# EAGLE board MBO (EAGLE 7.4.0)
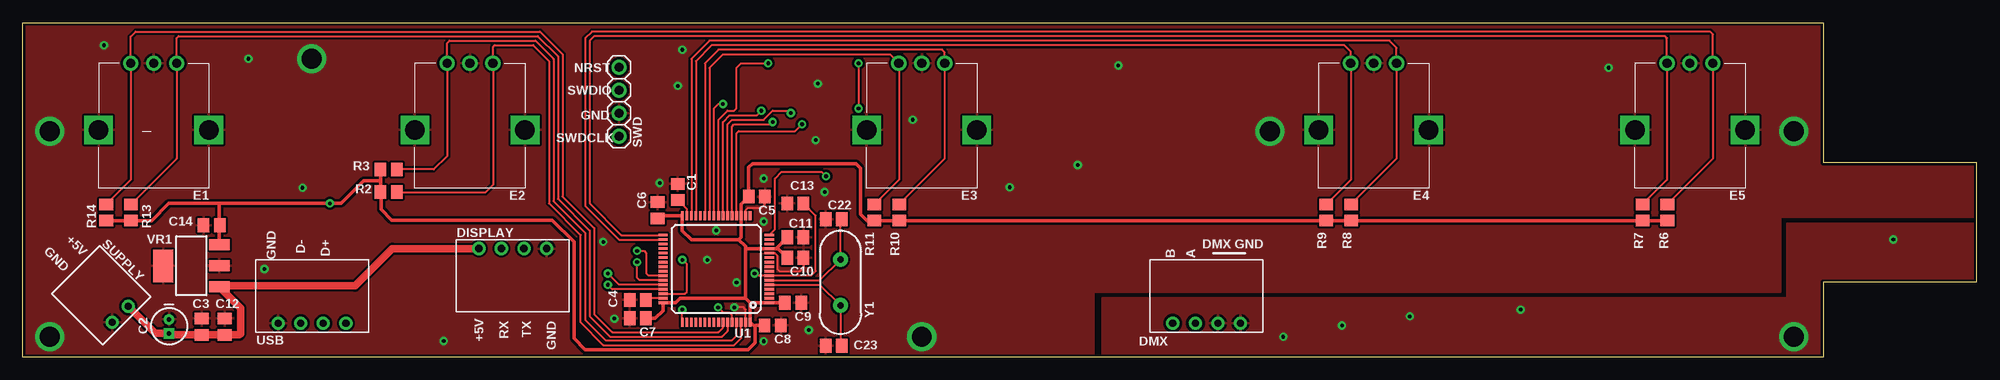
[diagram p0: board, top side]
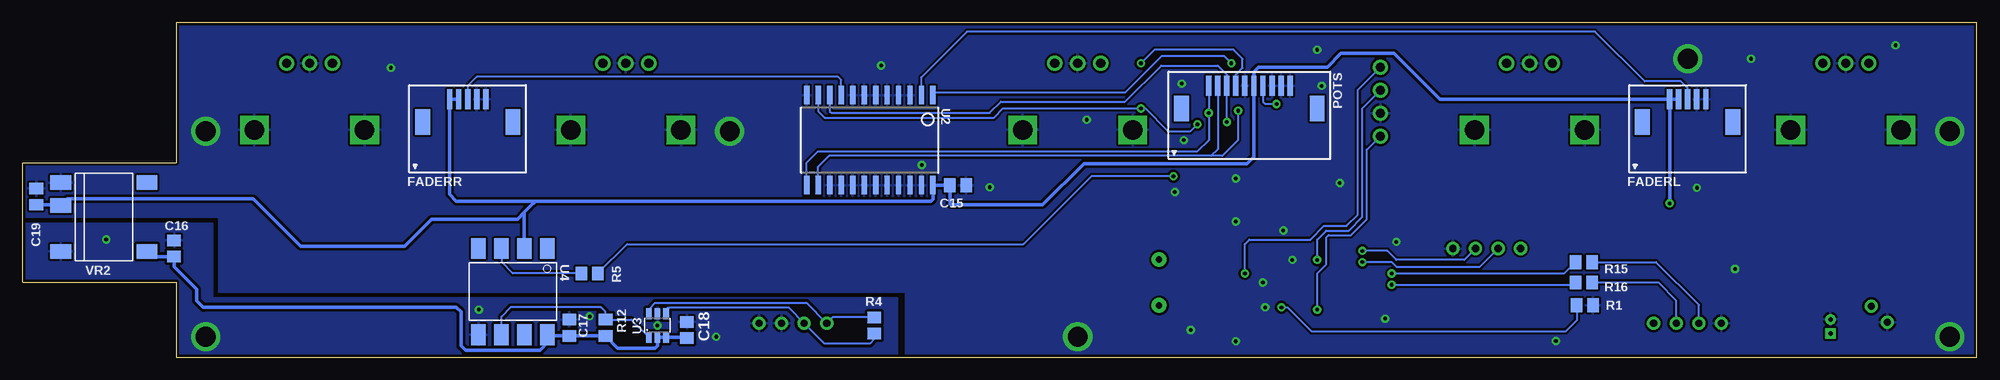
[diagram p1: board, bottom side, seen from below]

Size 216.25 x 37 mm. Coordinates in mm from the lower left corner, seen from the top.
Outline: 216.25,8.25 199.25,8.25 199.25,0 0,0 0,37 199.25,37 199.25,21.5 216.25,21.5 216.25,8.25
Copper layers (1*16): Top 0.035mm / dielectric 1.5mm / Bottom 0.035mm
Design rules "smiery *": minimum track width 8mil, minimum drill 12mil, track to track 7mil, track to pad 5mil, pad to pad 5mil, via to via 6mil, smd to smd 0mil, copper to edge 12mil, drill to drill 10mil, minimum pad ring 13mil, minimum via ring 10mil, stop-mask expansion 2mil, vias tented up to drill 25mil, thermal gap 10mil
Net classes: 0 default: width 0.203 mm; 1 vcc: width 0.254 mm

## Footprints (pad centres in the part's own frame; a part is rotated, then mirrored left to right if it is on the bottom)
C0805 = smd 1.27 x 1.524: 1 -0.9,0; 2 0.9,0
C-TH-E-0401 = drill 0.5 square: + 0.77,0 | drill 0.5: - -0.77,0
JST-XH-04P-H = drill 0.8: 1 -3.73,0; 2 -1.23,0; 3 1.27,0; 4 3.77,0
EC12E-1 = drill 1.016: A -2.54,-7.493; B 2.54,-7.493; C 0,-7.493 | drill 2.159 square: S1 -6.096,-0.127; S2 6.096,-0.127
MOLEX-52271-0579 = smd 0.6 x 2.2: 1 -2,3.5; 2 -1,3.5; 3 0,3.5; 4 1,3.5; 5 2,3.5 | smd 1.65 x 2.8: S1 -5,1; S2 5,1
MOLEX-52271-1079 = smd 0.6 x 2.2: 1 -4.5,3.5; 2 -3.5,3.5; 3 -2.5,3.5; 4 -1.5,3.5; 5 -0.5,3.5; 6 0.5,3.5; 7 1.5,3.5; 8 2.5,3.5; 9 3.5,3.5; 10 4.5,3.5 | smd 1.65 x 2.8: S1 -7.5,1; S2 7.5,1
R0805 = smd 1.27 x 1.524: 1 -0.9,0; 2 0.9,0
JST-XH-02P-H = drill 0.8: 1 -1.25,0; 2 1.25,0
1X04-2.54 = drill 1.016: 1 -3.81,0; 2 -1.27,0; 3 1.27,0; 4 3.81,0
TQFP-64-10X10-HS = smd 1 x 0.3: 1 -5.875,3.75; 2 -5.875,3.25; 3 -5.875,2.75; 4 -5.875,2.25; 5 -5.875,1.75; 6 -5.875,1.25; 7 -5.875,0.75; 8 -5.875,0.25; 9 -5.875,-0.25; 10 -5.875,-0.75; 11 -5.875,-1.25; 12 -5.875,-1.75; 13 -5.875,-2.25; 14 -5.875,-2.75; 15 -5.875,-3.25; 16 -5.875,-3.75; 33 5.875,-3.75; 34 5.875,-3.25; 35 5.875,-2.75; 36 5.875,-2.25; 37 5.875,-1.75; 38 5.875,-1.25; 39 5.875,-0.75; 40 5.875,-0.25; 41 5.875,0.25; 42 5.875,0.75; 43 5.875,1.25; 44 5.875,1.75; 45 5.875,2.25; 46 5.875,2.75; 47 5.875,3.25; 48 5.875,3.75 | smd 0.3 x 1: 17 -3.75,-5.875; 18 -3.25,-5.875; 19 -2.75,-5.875; 20 -2.25,-5.875; 21 -1.75,-5.875; 22 -1.25,-5.875; 23 -0.75,-5.875; 24 -0.25,-5.875; 25 0.25,-5.875; 26 0.75,-5.875; 27 1.25,-5.875; 28 1.75,-5.875; 29 2.25,-5.875; 30 2.75,-5.875; 31 3.25,-5.875; 32 3.75,-5.875; 49 3.75,5.875; 50 3.25,5.875; 51 2.75,5.875; 52 2.25,5.875; 53 1.75,5.875; 54 1.25,5.875; 55 0.75,5.875; 56 0.25,5.875; 57 -0.25,5.875; 58 -0.75,5.875; 59 -1.25,5.875; 60 -1.75,5.875; 61 -2.25,5.875; 62 -2.75,5.875; 63 -3.25,5.875; 64 -3.75,5.875
SO24-W = smd 2.032 x 0.6: 1 -4.975,6.985; 2 -4.975,5.715; 3 -4.975,4.445; 4 -4.975,3.175; 5 -4.975,1.905; 6 -4.975,0.635; 7 -4.975,-0.635; 8 -4.975,-1.905; 9 -4.975,-3.175; 10 -4.975,-4.445; 11 -4.975,-5.715; 12 -4.975,-6.985; 13 4.975,-6.985; 14 4.975,-5.715; 15 4.975,-4.445; 16 4.975,-3.175; 17 4.975,-1.905; 18 4.975,-0.635; 19 4.975,0.635; 20 4.975,1.905; 21 4.975,3.175; 22 4.975,4.445; 23 4.975,5.715; 24 4.975,6.985
TSOT23-6 = smd 0.62 x 1.22: 1 -0.95,-1.3; 2 0,-1.3; 3 0.95,-1.3; 4 0.95,1.3; 5 0,1.3; 6 -0.95,1.3
SMD-8 = smd 2.3 x 1.6: 1 -4.77,3.81; 2 -4.77,1.27; 3 -4.77,-1.27; 4 -4.77,-3.81; 5 4.77,-3.81; 6 4.77,-1.27; 7 4.77,1.27; 8 4.77,3.81
SOT223 = smd 2.235 x 1.219: 1 -3.099,2.311; 2 -3.099,0; 3 -3.099,-2.311 | smd 2.2 x 3.6: 4 3.099,0
SMD-8-5 = smd 1.6 x 2.3: 1 -3.81,-4.77; 2 -1.27,-4.77; 4 3.81,-4.77; 5 3.81,4.77; 8 -3.81,4.77
HC49US = drill 0.7 pad 1.651: 1 -2.54,0; 2 2.54,0

## Placement (x,y rotation side)
C1  2.2u  [C0805]  72.5,18.25 270 top
C2  10u  [C-TH-E-0401]  16.22,3.4 270 top
C3  100n  [C0805]  19.81,3.37 90 top
C4  2.2u  [C0805]  68.07,6.31 180 top
C5  100n  [C0805]  81.25,17.75 0 top
C6  100n  [C0805]  70.25,16.25 90 top
C7  100n  [C0805]  68.07,4.28 180 top
C8  100n  [C0805]  83,3.5 0 top
C9  100n  [C0805]  85.25,6 0 top
C10  1u  [C0805]  85.5,11 0 top
C11  100n  [C0805]  85.5,13.25 0 top
C12  4.7u  [C0805]  22.35,3.37 90 top
C13  100n  [C0805]  85.5,17 180 top
C14  4.7u  [C0805]  20.92,14.59 180 top
C15  100n  [C0805]  112.75,19 0 bottom
C16  10u  [C0805]  199.5,12 90 bottom
C17  100n  [C0805]  155.75,3.25 270 bottom
C18  100n  [C0805]  142.75,3 270 bottom
C19  4.7u  [C0805]  214.75,17.75 90 bottom
C22  20p  [C0805]  89.75,15.25 180 top
C23  20p  [C0805]  89.75,1.25 0 top
DISPLAY  PINHD-1X04-JST-XH-H  [JST-XH-04P-H]  54.25,12 180 top
DMX  PINHD-1X04-JST-XH-H  [JST-XH-04P-H]  131,3.75 0 top
E1  ALPS-EC12E24404AX  [EC12E-1]  14.5,25 180 top
E2  ALPS-EC12E24404AX  [EC12E-1]  49.5,25 180 top
E3  ALPS-EC12E24404AX  [EC12E-1]  99.5,25 180 top
E4  ALPS-EC12E24404AX  [EC12E-1]  149.5,25 180 top
E5  ALPS-EC12E24404AX  [EC12E-1]  184.5,25 180 top
FADERL  PINHD-1X05-FFC-1MM-Z  [MOLEX-52271-0579]  32,25 0 bottom
FADERR  PINHD-1X05-FFC-1MM-Z  [MOLEX-52271-0579]  167,25 0 bottom
POTS  PINHD-1X10-FFC-1MM-Z  [MOLEX-52271-1079]  80.5,26.5 0 bottom
R1  510  [R0805]  43.38,5.72 0 bottom
R2  10k  [R0805]  40.5,18.25 180 top
R3  10k  [R0805]  40.5,20.75 180 top
R4  133  [R0805]  122,3.5 270 bottom
R5  750  [R0805]  153.5,9.25 0 bottom
R6  10k  [R0805]  182,16 270 top
R7  10k  [R0805]  179.25,16 270 top
R8  10k  [R0805]  147,16 270 top
R9  10k  [R0805]  144.25,16 270 top
R10  10k  [R0805]  97,16 270 top
R11  10k  [R0805]  94.25,16 270 top
R12  4.7k  [R0805]  151.75,3.25 270 bottom
R13  10k  [R0805]  12,16 270 top
R14  10k  [R0805]  9.25,16 270 top
R15  22  [R0805]  43.5,10.5 0 bottom
R16  22  [R0805]  43.5,8.25 0 bottom
SUPPLY  PINHD-1X02-JST-XH-H  [JST-XH-02P-H]  10.81,4.73 45 top
SWD  PINHD-1X04-TH-2.54MM  [1X04-2.54]  66,28.25 90 top
U1  STM32F405RGT6-10X10-HS  [TQFP-64-10X10-HS]  76.75,9.75 180 top
U2  MC14067BDWR2G-SO24W  [SO24-W]  122.5,24 270 bottom
U3  XR33193ESBTR  [TSOT23-6]  146,3.5 0 bottom
U4  6N137-SMD  [SMD-8]  162,7.25 270 bottom
USB  PINHD-1X04-JST-XH-H  [JST-XH-04P-H]  32,3.75 0 top
VR1  MCP1825  [SOT223]  18.68,10.09 180 top
VR2  ISE0303A  [SMD-8-5]  207.25,15.5 270 bottom
Y1  8MHz  [HC49US]  90.5,8.25 270 top

## Library data of the parts
C1-C19 C22 C23 DISPLAY DMX R1-R16 SUPPLY SWD USB VR2 = igor_lbr
E1-E5 = igor_lbr; MANUFACTURER: ALPS; MPN: EC12E24404A8
FADERL FADERR = igor_lbr; MANUFACTURER: Molex; MPN: 52271-0579
POTS = igor_lbr; MANUFACTURER: Molex; MPN: 52271-1079
U1 = igor_lbr; MANUFACTURER: ST Microelectronics; MPN: STM32F405RGT6
U2 = igor_lbr; MANUFACTURER: ON Semiconductor; MPN: MC14067BDWR2G
U3 = igor_lbr; MANUFACTURER: MaxLinear; MPN: XR33193ESBTR
U4 = igor_lbr; MANUFACTURER: Lite-On; MPN: 6N137S
VR1 = igor_lbr; MANUFACTURER: Microchip; MPN: MCP1825S-3302E/DB
Y1 = igor_lbr; MANUFACTURER: TXC; MPN: 9B-16.000MEEJ-B

## Nets
+3V3: C5.1 C6.1 C7.1 C8.1 C9.1 C10.1 C11.1 C14.1 C15.1 C19.1 FADERL.1 FADERL.2 FADERR.1 FADERR.2 POTS.6 R2.2 R3.2 R6.2 R7.2 R8.2 R9.2 R10.2 R11.2 R13.2 R14.2 U1.1 U1.13 U1.19 U1.32 U1.48 U1.64 U2.24 U4.2 VR1.3 VR2.2
+3V3_DMX: C16.1 C17.2 C18.2 R12.2 U3.2 U3.3 U4.8 VR2.5
+5V: C2.+ C3.1 C12.1 DISPLAY.4 SUPPLY.2 VR1.1
BOOT0: R1.1 U1.60
BTLDR_BUTTON: U1.41
DISPLAY_RX: DISPLAY.3 U1.43
DISPLAY_TX: DISPLAY.2 U1.42
DMX: R5.2 U1.16
DMX_A: DMX.2 R4.2 U3.4
DMX_B: DMX.1 R4.1 U3.6
E1A: E1.A R13.1 U1.59
E1B: E1.B R14.1 U1.58
E2A: E2.A R2.1 U1.62
E2B: E2.B R3.1 U1.61
E3A: E3.A R10.1 U1.27
E3B: E3.B R11.1 U1.26
E4A: E4.A R8.1 U1.30
E4B: E4.B R9.1 U1.29
E5A: E5.A R6.1 U1.34
E5B: E5.B R7.1 U1.33
E7A: U1.57
E7B: U1.56
FADER_L: FADERL.3 U2.2
FADER_R: FADERR.3 U2.9
GND: C1.1 C2.- C3.2 C4.2 C5.2 C6.2 C7.2 C8.2 C9.2 C10.2 C11.2 C12.2 C13.2 C14.2 C15.2 C19.2 C22.2 C23.1 DISPLAY.1 E1.C E1.S1 E1.S2 E2.C E2.S1 E2.S2 E3.C E3.S1 E3.S2 E4.C E4.S1 E4.S2 E5.C E5.S1 E5.S2 FADERL.4 FADERL.5 FADERR.4 FADERR.5 POTS.5 POTS.8 POTS.9 POTS.10 R1.2 SUPPLY.1 SWD.2 U1.12 U1.18 U1.63 U2.3 U2.4 U2.5 U2.6 U2.7 U2.8 U2.12 U2.15 U2.16 U2.17 U2.18 U2.19 U2.20 U2.21 U2.22 U2.23 USB.1 VR1.2 VR1.4 VR2.1
GND_DMX: C16.2 C17.1 C18.1 DMX.3 DMX.4 U3.5 U4.5 VR2.4
MUX_COMMON_1: POTS.7 U1.25
MUX_COMMON_2: U1.24 U2.1
MUX_S0: POTS.3 U1.21 U2.10
MUX_S1: POTS.4 U1.20 U2.11
MUX_S2: POTS.2 U1.23 U2.14
MUX_S3: POTS.1 U1.22 U2.13
N$1: U1.53
N$2: C1.2 U1.31
N$3: C4.1 U1.47
N$4: R5.1 U4.3
N$5: R12.1 U3.1 U4.6
NRST: C13.1 SWD.4 U1.7
OSC_IN: C23.2 U1.5 Y1.2
OSC_OUT: C22.1 U1.6 Y1.1
SWDCLK: SWD.1 U1.49
SWDIO: SWD.3 U1.46
USB_DM: R15.1 U1.44
USB_DM_ESD: R15.2 USB.2
USB_DP: R16.1 U1.45
USB_DP_ESD: R16.2 USB.3

## Tracks (layer width: path | path; a pad name or v marks a point on that pad's centre or on a via)
+3V3  (via drill 0.4 pad 0.6)
  Top 0.406: C9.1 U1.1 80.5,6 | R6.2 R7.2 R8.2 R9.2 R10.2 R11.2 93.42,15.1 92.71,15.81 92.71,20.89 92.2,21.4 80.77,21.4 80.35,20.98 C5.1 79.5,16.9 U1.19 79.5,13.25 79.25,13 | 79.25,13 74,13 73,14 U1.32 70.53,15.62 C6.1 | 79.25,13 80,12.25 80,12 | 80,12 80,6.5 | 80,12 U1.13 83.35,12 | 80.5,6 U1.64 81.03,3.35 | 80.5,6 80,6.5 | 83.35,12 C11.1 | 83.35,12 83.6,12 C10.1 | R3.2 39.6,19.6 | 39.6,19.6 39.5,19.5 37.75,19.5 35.25,17 v34,17 21.75,17 | 39.6,19.6 R2.2 39.65,18.2 39.65,16.35 40.85,15.15 58.6,15.15 61,12.75 61,2.06 62.23,0.83 80.26,0.83 81.03,1.59 81.03,3.35 | R14.2 R13.2 14.27,15.1 16.17,17 21.75,17 | C7.1 70,4.28 70.87,5.14 70.87,5.99 U1.48 72.25,6 72.75,6.5 80,6.5 | C8.1 81.18,3.5 81.03,3.35 | 21.75,17 21.77,16.98 21.77,14.63 C14.1 21.77,14.54 VR1.3
  Bottom 0.406: FADERR.2 FADERR.1 169,18 168.25,17.25 159.5,17.25 | 159.5,17.25 115.75,17.25 115.52,17.48 U2.24 115.49,19 C15.1 113.65,16.94 113.54,16.83 103.38,16.83 98.81,21.4 80.77,21.4 80,22.17 POTS.6 80,31.57 79.5,32.07 71.88,32.07 70.36,33.59 64.52,33.59 59.42,28.5 FADERL.1 | FADERL.1 v34,17 | FADERL.1 FADERL.2 | C19.1 212.1,16.85 VR2.2 211.29,17.5 190.75,17.5 185.5,12.25 174,12.25 171,15.25 161.5,15.25 160.73,16.02 | 159.5,17.25 160.12,16.62 160.73,16.02 | U4.2 160.73,16.02
+3V3_DMX
  Bottom 0.406: C18.2 142.85,2.2 U3.3 U3.2 146,1.25 146.25,1 150.4,1 R12.2 C17.2 158.06,2.35 U4.8 158.19,1.56 159,0.75 167.25,0.75 167.75,1.25 167.75,5 168.25,5.5 196.25,5.5 197,6.25 197,7.5 199.5,10 C16.1 201.89,11.1 VR2.5
+5V
  Top 0.813: DISPLAY.4 40.89,12 36.78,7.89 21.88,7.89 VR1.1 24.13,5.43 24.13,2.6 23.99,2.47 C12.1 C3.1 16.39,2.47 C2.+ 14.68,2.63 SUPPLY.2
BOOT0  (via drill 0.4 pad 0.6)
  Top 0.203: U1.60 78.5,4.62 78.23,4.89 77.57,4.89 v76.96,5.5
  Bottom 0.203: v76.96,5.5 76.3,5.5 73.66,2.86 45.47,2.86 44.28,4.05 R1.1
DISPLAY_RX  (via drill 0.4 pad 0.6)
  Top 0.203: U1.43 68.25,8.5 68,8.75 v68,10.5
  Bottom 0.203: v68,10.5 64.75,10.5 64.25,10 54.98,10 DISPLAY.3
DISPLAY_TX  (via drill 0.4 pad 0.6)
  Top 0.203: U1.42 69.25,9 69,9.25 69,11.5 68.75,11.75 v68,11.75
  Bottom 0.203: v68,11.75 65.25,11.75 64.25,10.75 56.73,10.75 DISPLAY.2
DMX  (via drill 0.4 pad 0.6)
  Top 0.203: U1.16 83.25,14.12 83.25,19.75 84,20.5 88.4,20.5 v88.9,20
  Bottom 0.203: v88.9,20 98,20 105.5,12.5 149.35,12.5 R5.2
DMX_A
  Bottom 0.203: U3.4 145.05,5.2 144.75,5.5 131.52,5.5 DMX.2 127.52,1.5 122.5,1.5 122,2 R4.2
DMX_B
  Bottom 0.203: R4.1 126.62,4.4 DMX.1 129.52,6 146.25,6 146.95,5.3 U3.6
E1A
  Top 0.203: R13.1 17.04,21.94 E1.A 17.04,35.29 17.25,35.5 57,35.5 59.25,33.25 59.25,17.5 62.75,14 62.75,4.5 64.98,2.27 77.39,2.27 78,2.88 U1.59
E1B
  Top 0.203: U1.58 77.5,3.26 77.01,2.77 65.23,2.77 63.25,4.75 63.25,14.25 59.75,17.75 59.75,33.5 57.25,36 12.5,36 11.96,35.46 E1.B 11.96,19.61 R14.1
E2A
  Top 0.203: R2.1 51.25,18.25 52.04,19.04 E2.A 52.04,34.29 52.25,34.5 56.5,34.5 58.25,32.75 58.25,17 61.75,13.5 61.75,3.85 64.26,1.33 78.74,1.33 79.5,2.1 U1.62
E2B
  Top 0.203: R3.1 45.5,20.75 46.96,22.21 E2.B 46.96,34.71 47.25,35 56.75,35 58.75,33 58.75,17.25 62.25,13.75 62.25,4.11 64.52,1.84 78.49,1.84 78.99,2.35 U1.61
E3A
  Top 0.203: U1.27 75.5,32.5 77,34 101.75,34 102.04,33.71 E3.A 102.04,21.94 R10.1
E3B
  Top 0.203: U1.26 76,32 77.49,33.49 95.96,33.49 E3.B 96.96,19.61 R11.1
E4A
  Top 0.203: U1.30 74,33 76,35 151.25,35 152.04,34.21 E4.A 152.04,21.94 R8.1
E4B
  Top 0.203: U1.29 74.5,32.75 76.25,34.5 146.25,34.5 146.96,33.79 E4.B 146.96,19.61 R9.1
E5A
  Top 0.203: U1.34 66,13 62.25,16.75 62.25,35.25 63,36 186.75,36 187.04,35.71 E5.A 187.04,21.94 R6.1
E5B
  Top 0.203: U1.33 66.25,13.5 62.75,17 62.75,35 63.25,35.5 181.75,35.5 181.96,35.29 E5.B 181.96,19.61 R7.1
FADER_L
  Bottom 0.203: U2.2 116.78,30.96 111.75,36 42.25,36 36.75,30.5 32.75,30.5 32,29.75 FADERL.3
FADER_R
  Bottom 0.203: U2.9 125.67,30.68 126,31 166,31 167,30 FADERR.3
GND  (via drill 0.4 pad 0.6, 2.2)
  Top 0.203: U1.18 80,16.25 80.25,16.5 81.75,16.5 82.1,16.85 82.1,17.7 C5.2 | U1.12 83.25,11.5 83.5,11.25 83.5,9.75 83.75,9.5 86,9.5 86.4,9.9 C10.2 | U1.63 80,5.25 79.75,5.5 v78.75,5.5
  other vias: 70.5,19.25 65.48,4.25 46.58,1.77 82,1.75 87,3 82,15 88.75,18.25 76.75,14 75.75,10.75 79,8.25 26.76,9.74 196,25 3,25 82,19.75 88,30.25 3,2.25 175.5,32 121.25,32.25 30.98,18.73 9,34.5 25,33 64.25,12.75 109.22,18.79 116.75,21.25 98.5,26.25 72.5,30 73,34 87.75,24 99.5,2.25 138,25 32,33
  pour Bottom (isolate 0.254): 194.5,7.25 118.5,7.25 118.5,0 0,0 0,37 199.25,37 199.25,21.5 216.25,21.5 216.25,15.5 194.5,15.5
  pour Top (isolate 0.254): 216.25,15.5 194.5,15.5 194.5,7.25 118.5,7.25 118.5,0 0,0 0,37 199.25,37 199.25,21.5 216.25,21.5
GND_DMX  (via drill 0.4 pad 0.6, 2.2)
  other vias: 196,2.25 139.5,2.25 165.75,5.25 207,13 153.5,4.5 146,3.5
  pour Bottom (isolate 0.305): 119.5,6.5 195.25,6.5 195.25,14.75 216.25,14.75 216.25,8.25 199.25,8.25 199.25,0 119.5,0
  pour Top (isolate 0.305): 119.5,6.5 195.25,6.5 195.25,14.75 216.25,14.75 216.25,8.25 199.25,8.25 199.25,0 119.5,0
MUX_COMMON_1  (via drill 0.4 pad 0.6)
  Top 0.203: U1.25 76.5,27.5 77,28 v77.5,28
  Bottom 0.203: POTS.7 79,28.25 78.75,28 v77.5,28
MUX_COMMON_2  (via drill 0.4 pad 0.6)
  Top 0.203: U1.24 77,26.25 78,27.25 78.75,27.25 79,27.5 79,32 79.5,32.5 v82.5,32.5
  Bottom 0.203: v82.5,32.5 83.25,33.25 90.25,33.25 94.25,29.25 115.24,29.25 U2.1
MUX_S0  (via drill 0.4 pad 0.6)
  Top 0.203: U1.21 78.5,25.5 78.75,25.75 82.75,25.75 v83,26
  Bottom 0.203: v83,26 POTS.3 83,31.25 84,32.25 90.25,32.25 94.25,28.25 108,28.25 109.25,27 126.75,27 126.94,27.2 U2.10
MUX_S1  (via drill 0.4 pad 0.6)
  Top 0.203: U1.20 79,24.75 79.25,25 85.5,25 v86.25,25.75 | v92.5,32.5 v92.5,27.5
  Bottom 0.203: U2.11 128.22,27.21 127.5,26.5 108.75,26.5 107.75,27.5 v92.5,27.5 92,27.5 89.5,25 87,25 v86.25,25.75 | POTS.4 82,31.25 81.25,32 81.25,33 82.25,34 91,34 v92.5,32.5
MUX_S2  (via drill 0.4 pad 0.6)
  Top 0.203: U1.23 77.5,26 78.25,26.75 81.25,26.75 v81.75,27.25
  Bottom 0.203: v81.75,27.25 81.75,24 83.5,22.25 84.75,22.25 | 84.75,22.25 127,22.25 128.22,21.04 U2.14 | POTS.2 84,23 84.75,22.25
MUX_S3  (via drill 0.4 pad 0.6)
  Top 0.203: U1.22 78,25.75 78.5,26.25 82,26.25 83,27.25 84.75,27.25 v85,27
  Bottom 0.203: POTS.1 v85,27 85,24 86.25,22.75 128.25,22.75 129.49,21.52 U2.13
N$2
  Top 0.203: U1.31 73.5,16.35 C1.2
N$3
  Top 0.203: U1.47 69.16,6.5 C4.1
N$4
  Bottom 0.203: R5.1 162,9.25 163.27,10.52 U4.3
N$5
  Bottom 0.203: U3.1 148.9,4.15 R12.1 151.75,5 152.25,5.5 162.25,5.5 163.27,4.48 U4.6
NRST  (via drill 0.4 pad 0.6)
  Top 0.203: v81,9.25 81.25,9 U1.7 87.25,9 87.75,9.5 87.75,15.65 C13.1
  Bottom 0.203: v81,9.25 81,12.5 80.5,13 73.75,13 72.25,14.5 69.75,14.5 68.5,15.75 68.5,29.56 SWD.4
OSC_IN
  Top 0.203: U1.5 88.21,8 Y1.2 90.5,1.4 C23.2
OSC_OUT
  Top 0.203: U1.6 88.21,8.5 Y1.1 90.5,15.1 C22.1
SWDCLK  (via drill 0.4 pad 0.6)
  Top 0.203: U1.49 v73,5.25
  Bottom 0.203: v73,5.25 73,9.25 72,10.25 72,13.25 71.75,13.5 69.25,13.5 67.5,15.25 67.5,22.94 SWD.1
SWDIO  (via drill 0.4 pad 0.6)
  Top 0.203: U1.46 73.25,7 73.5,7.25 73.5,10.25 v73,10.75
  Bottom 0.203: v73,10.75 73,13 72,14 69.5,14 68,15.5 68,27.52 SWD.3
USB_DM  (via drill 0.4 pad 0.6)
  Top 0.203: U1.44 66,8 v64.75,9.25
  Bottom 0.203: v64.75,9.25 45.65,9.25 R15.1
USB_DM_ESD
  Bottom 0.203: R15.2 35.5,10.5 30.77,5.77 USB.2
USB_DP  (via drill 0.4 pad 0.6)
  Top 0.203: U1.45 65.25,7.5 v64.75,8
  Bottom 0.203: v64.75,8 44.65,8 R16.1
USB_DP_ESD
  Bottom 0.203: R16.2 35.27,8.25 33.27,6.25 USB.3

## Text on the board
tNames: NRST | SWDIO | GND | SWDCLK | GND | D- | D+ | +5V | B | A | DMX GND | GND | +5V | RX | TX | GND